# Altium PCB LPCB281R0.PcbDoc
Units mm, origin at the board's own origin, x right, y up, seen from the top; angles counter-clockwise.
Board outline 96 x 79 mm, 2 copper layers (Top Layer, Bottom Layer); 47 components, 22 nets, 135 pads, 13 vias.
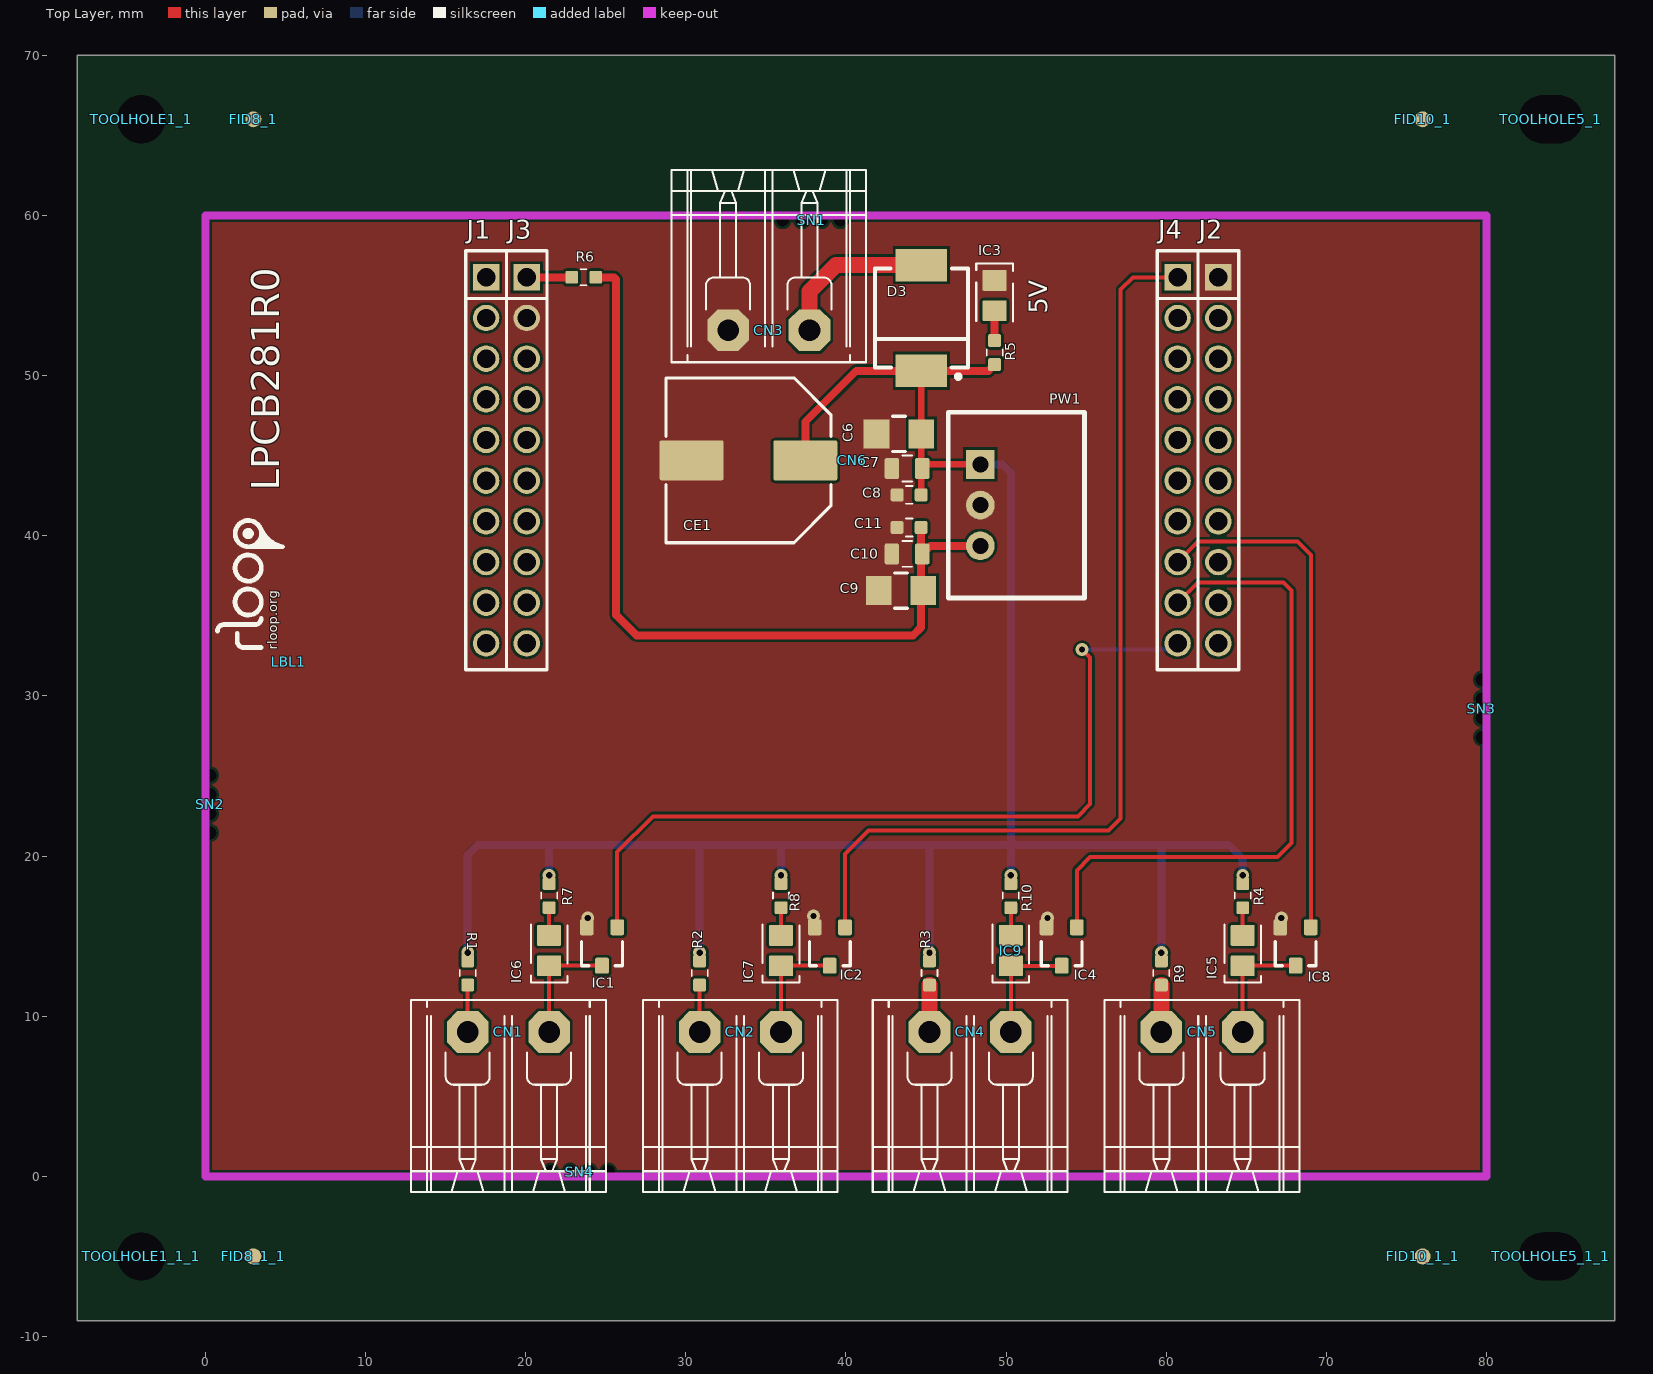
[diagram p0: Top Layer view]
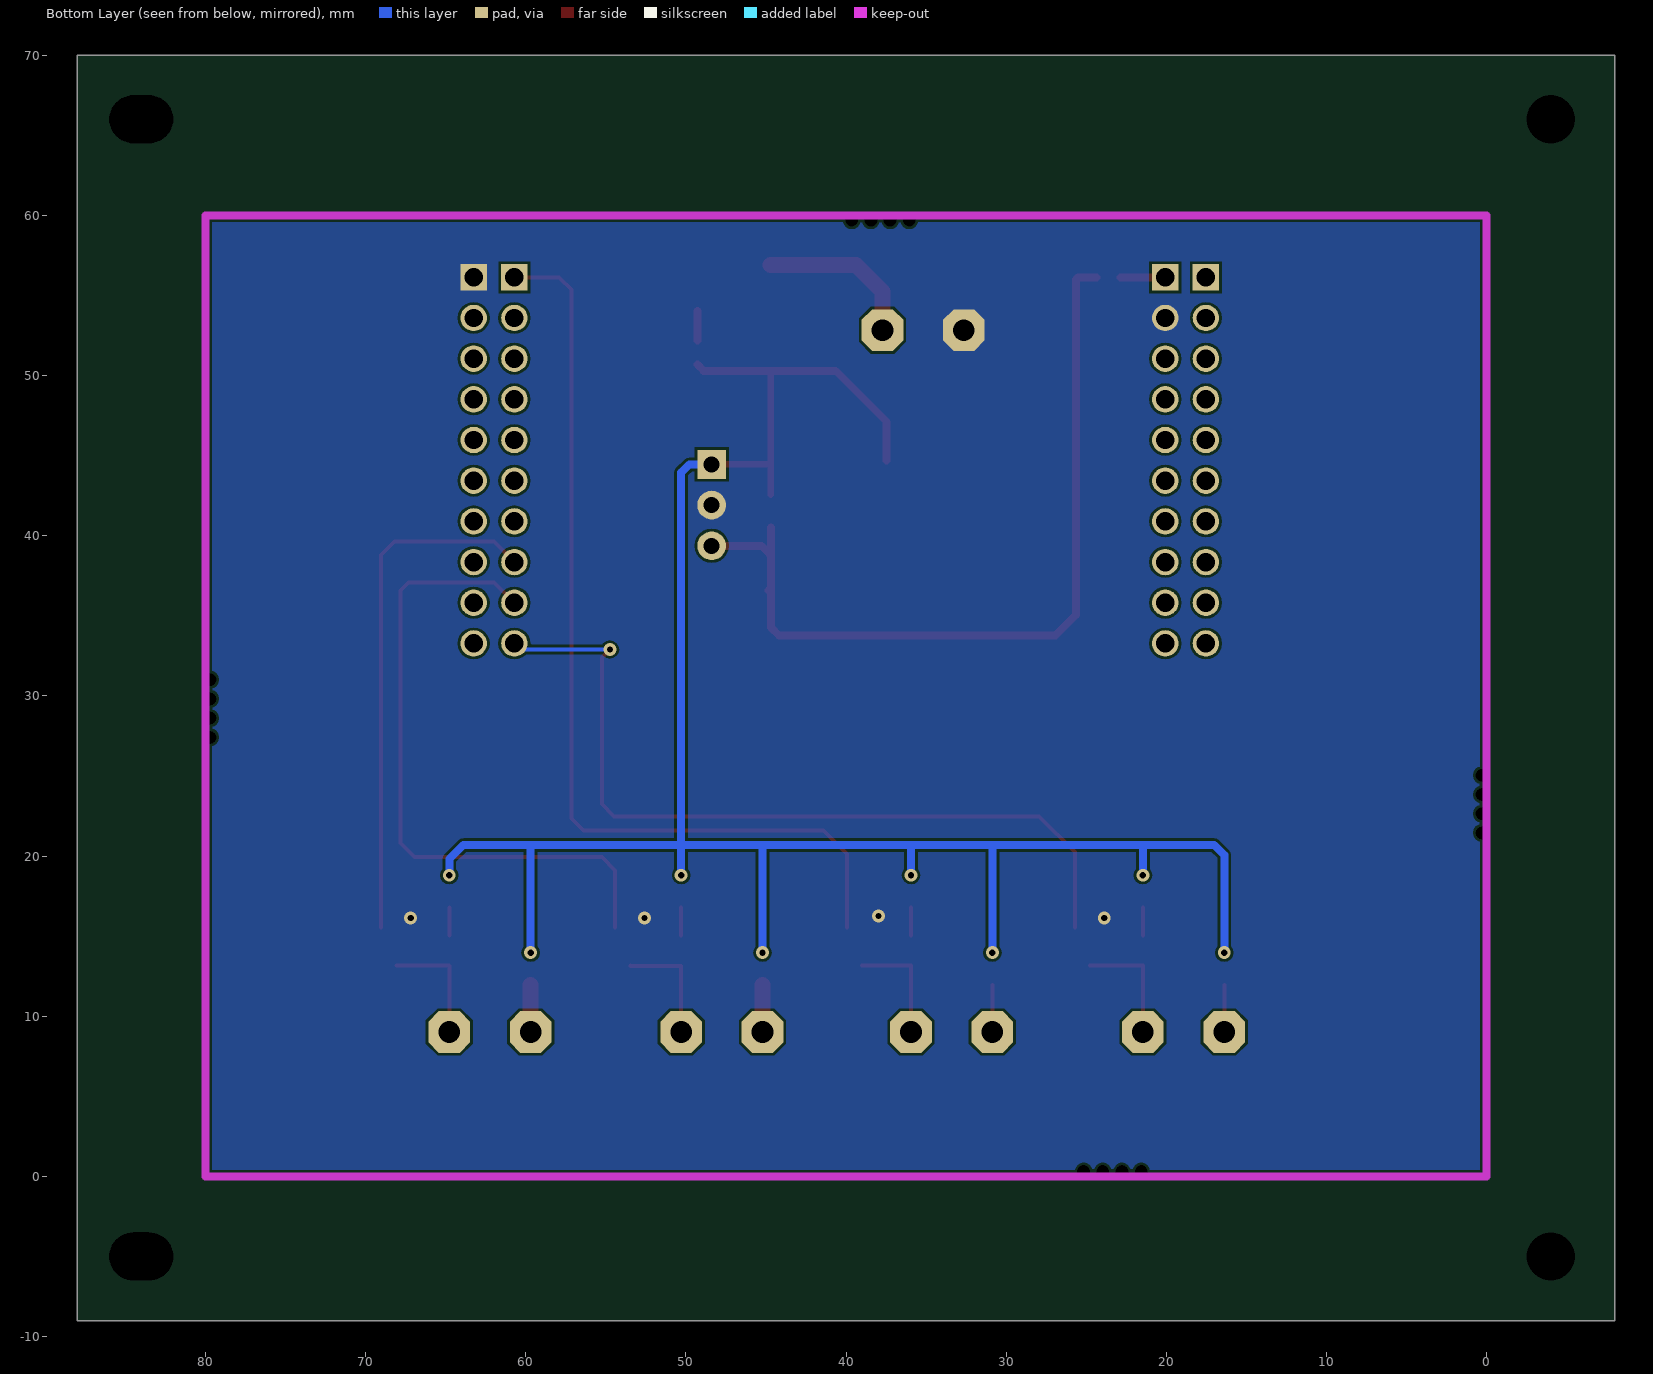
[diagram p1: Bottom Layer view, seen from below]

## Layer stack, top to bottom
Top Layer: signal copper 0.0356
Dielectric: dielectric 0.32, FR-4, Dk 4.8
Bottom Layer: signal copper 0.0356

## Board outline
-8,-9 -8,70 88,70 88,-9

## Design rules (kind name [scope] priority, off if disabled: settings)
Clearance [All] p1: gap=0.16
Height [All] p1 off: minheight=0 maxheight=25.4 prefheight=12.7
HoleSize [All] p1: absolutevalues=TRUE maxlimit=6 minlimit=0.025 maxpercent=80.000 minpercent=20.000
MinimumSolderMaskSliver [All] p1 off: minsoldermaskwidth=0.1
PlaneConnect PlaneConnect_1 [IsVia] p1: planeconnectstyle=Direct reliefexpansion=0.508 reliefentries=4 reliefconductorwidth=0.254 reliefairgap=0.254
PlaneConnect [All] p2: planeconnectstyle=Relief reliefexpansion=0.508 reliefentries=4 reliefconductorwidth=0.254 reliefairgap=0.254
PolygonConnect [IsVia] p1: connectstyle=Direct reliefconductorwidth=0.254 reliefentries=4 polygonreliefangle="90 Angle" airgapwidth=0.254
PolygonConnect PolygonConnect_1 [All] p2: connectstyle=Direct reliefconductorwidth=0.254 reliefentries=4 polygonreliefangle="90 Angle" airgapwidth=0.254
RoomDefinition "U_LPCB281 - LIGHT TOWER" [InComponentClass('U_LPCB281 - LIGHT TOWER')] p1: confinementstyle=ConfineIn formatcopy=TRUE lockcomponents=FALSE outline -154.685,-121.268 -103.885,-121.268 -103.885,-95.868 -154.685,-95.868
RoomDefinition "U_LPCB281 - RM57 LAUNCH" [InComponentClass('U_LPCB281 - RM57 LAUNCH')] p2: confinementstyle=ConfineIn formatcopy=TRUE lockcomponents=FALSE outline 169.038,50.563 204.979,50.563 204.979,100.855 169.038,100.855
RoomDefinition "U_LPCB281 - POWER" [InComponentClass('U_LPCB281 - POWER')] p3: confinementstyle=ConfineIn formatcopy=TRUE lockcomponents=FALSE outline 169.165,31.386 336.932,31.386 336.932,50.69 169.165,50.69
RoutingVias [All] p1: holewidth=0.6 width=1.2 viastyle="Through Hole" minholewidth=0.3 minwidth=0.6 maxholewidth=1 maxwidth=2
SilkToSilkClearance [All] p1 off: silktosilkclearance=0.1
SilkToSolderMaskClearance [IsPad] p1 off: minsilkscreentomaskgap=0.1 clearancetoexposedcopper=TRUE
SolderMaskExpansion [All] p1: expansion=0.102
Width [All] p1: maxlimit=1 minlimit=0.16 preferedwidth=0.2
22 further rules are at their usual default settings.

## Classes and differential pairs
component class "U_LPCB281 - DIR RELAYS": CN1 CN2 CN4 IC1 IC2 IC4 IC6 IC7 IC9 R1 R2 R3 R7 R8 R10
component class "U_LPCB281 - POWER": C6 C7 C8 C9 C10 C11 CE1 CN3 D3 IC3 PW1 R5
component class "U_LPCB281 - LIGHT TOWER": CN5 IC5 IC8 R4 R9
component class "U_LPCB281 - RM57 LAUNCH": CN6 R6
component class "LPCB281 - TOP": LBL1 SN1 SN2 SN3 SN4

## Components (designator, comment, footprint, x,y, rotation, side; value= is the part's Value field where it differs from the comment)
C6 "10uF / 50V / 10% / SMD 1206" LFP043__CC3216-1206 43.307,46.355 r180 top
C7 "1uF / 50V / 10% / SMD 0805" LFP010__CC2012-0805-IPC7351_B 43.815,44.196 r180 top
C8 "100nF / 50V / 10% / SMD 0603" LFP011__CC1608-0603-IPC7351_B 43.942,42.545 r180 top
C9 "10uF / 50V / 10% / SMD 1206" LFP043__CC3216-1206 43.434,36.576 r180 top
C10 "1uF / 50V / 10% / SMD 0805" LFP010__CC2012-0805-IPC7351_B 43.815,38.862 r180 top
C11 "100nF / 50V / 10% / SMD 0603" LFP011__CC1608-0603-IPC7351_B 43.942,40.513 r180 top
CE1 "330uF / 35V / 20% / SMD 10x10" LFP041__NICHICON_WT_10X10 33.909,44.704 r180 top
CN1 "691 313 510 002" "691 313 510 002" 16.383,9.017 r0 top
CN2 "691 313 510 002" "691 313 510 002" 30.861,9.017 r0 top
CN3 "691 313 510 002" "691 313 510 002" 37.719,52.832 r180 top
CN4 "691 313 510 002" "691 313 510 002" 45.212,9.017 r0 top
CN5 "691 313 510 002" "691 313 510 002" 59.69,9.017 r0 top
CN6 "RM57LAUNCHXL_BP_40P_1" RM57LAUNCHXL_BP_40P_1 17.526,56.134 r0 top
D3 "S3M-E3/57T" LFP040__DO-214AB 44.704,53.594 r90 top
FID8_1 "FIDUCIAL" LFP113__FIDUCIAL 3,66 r0 top
FID8_1_1 "FIDUCIAL" LFP113__FIDUCIAL 3,-5 r0 top
FID10_1 "FIDUCIAL" LFP113__FIDUCIAL 76,66 r0 top
FID10_1_1 "FIDUCIAL" LFP113__FIDUCIAL 76,-5 r0 top
IC1 "NUD3124LT1G" LFP021__SOT23 24.765,14.351 r180 top
IC2 "NUD3124LT1G" LFP021__SOT23 38.989,14.351 r180 top
IC3 "EL-17-21VGC/TR8" CR2012-0805-LED 49.276,54.991 r270 top
IC4 "NUD3124LT1G" LFP021__SOT23 53.467,14.351 r180 top
IC5 "EL-17-21VGC/TR8" CR2012-0805-LED 64.77,14.097 r90 top
IC6 "EL-17-21VGC/TR8" CR2012-0805-LED 21.463,14.097 r90 top
IC7 "EL-17-21VGC/TR8" CR2012-0805-LED 35.941,14.097 r90 top
IC8 "NUD3124LT1G" LFP021__SOT23 68.072,14.351 r180 top
IC9 "EL-17-21VGC/TR8" CR2012-0805-LED 50.292,14.097 r90 top
LBL1 "RLOOP_LOGO" RLOOP_LOGO 5.207,32.131 r90 top
PW1 "173010542" 173010542 48.387,41.91 r270 top
R1 "0R / 0.1W / SMD 0603" LFP020__CR1608-0603-IPC7351_B 16.383,12.7 r90 top
R2 "0R / 0.1W / SMD 0603" LFP020__CR1608-0603-IPC7351_B 30.861,12.7 r90 top
R3 "0R / 0.1W / SMD 0603" LFP020__CR1608-0603-IPC7351_B 45.212,12.7 r90 top
R4 "2.2K / 0.1W / 1% / SMD 0603" LFP020__CR1608-0603-IPC7351_B 64.77,17.526 r270 top
R5 "2.2K / 0.1W / 1% / SMD 0603" LFP020__CR1608-0603-IPC7351_B 49.276,51.435 r270 top
R6 "0R / 0.1W / SMD 0603" LFP020__CR1608-0603-IPC7351_B 23.622,56.134 r0 top
R7 "2.2K / 0.1W / 1% / SMD 0603" LFP020__CR1608-0603-IPC7351_B 21.463,17.526 r270 top
R8 "2.2K / 0.1W / 1% / SMD 0603" LFP020__CR1608-0603-IPC7351_B 35.941,17.526 r270 top
R9 "0R / 0.1W / SMD 0603" LFP020__CR1608-0603-IPC7351_B 59.69,12.7 r90 top
R10 "2.2K / 0.1W / 1% / SMD 0603" LFP020__CR1608-0603-IPC7351_B 50.292,17.526 r270 top
SN1 "PCB_SNAPOUT_0.3MM" PCB_SNAPOUT_0.3MM 37.846,60 r180 top
SN2 "PCB_SNAPOUT_0.3MM" PCB_SNAPOUT_0.3MM 0,23.241 r270 top
SN3 "PCB_SNAPOUT_0.3MM" PCB_SNAPOUT_0.3MM 80,29.21 r90 top
SN4 "PCB_SNAPOUT_0.3MM" PCB_SNAPOUT_0.3MM 23.368,0 r0 top
TOOLHOLE1_1 "Comment" TOOL-1#1 -4,66 r0 top
TOOLHOLE1_1_1 "Comment" TOOL-1#1 -4,-5 r0 top
TOOLHOLE5_1 "Comment" TOOL-1#2 84,66 r0 top
TOOLHOLE5_1_1 "Comment" TOOL-1#2 84,-5 r0 top

## Footprints (in the part's own frame and the unit in brackets; to place one, negate y for a bottom-side part, rotate by r counter-clockwise, add the part's x,y. Pads: shape width x height; smd on the part's side, far side on the other; paste and mask are expansions set on the pad)
"691 313 510 002" [mm] "Connector, Pluggable Terminal Block, 5.08mm, 2 Way, PTH"
  oct 2.6x2.6 hole 1.35: 1(0,0) 2(5.08,0)
  silkscreen extent -3.54,-10 8.62,2
173010542 [mm]
  rect 1.8x1.8 hole 1 paste-0.01: 1(-2.54,0)
  round 1.8 hole 1 paste-0.01: 2(0,0) 3(2.54,0)
  silkscreen extent -5.8,-2 5.8,6.5
CR2012-0805-LED [mm]
  rrect10% 1.3x1.5 smd paste-0.05: A(0.95,0) K(-0.95,0)
  silkscreen extent -2.01,-1.14 1.63,1.14
LFP010__CC2012-0805-IPC7351_B [mm]
  rrect25% 0.9x1.3 smd paste-0.01: 1(-0.95,0) 2(0.95,0)
  silkscreen extent -0.3,-0.8 0.3,0.8
LFP011__CC1608-0603-IPC7351_B [mm]
  rrect25% 0.8x0.8 smd: 1(-0.75,0) 2(0.75,0)
  silkscreen extent -0.2,-0.55 0.2,0.55
LFP020__CR1608-0603-IPC7351_B [mm]
  rrect25% 0.8x0.8 smd: 1(-0.75,0) 2(0.75,0)
  silkscreen extent -0.2,-0.5 0.2,0.5
LFP021__SOT23 [mm] "SOT-23; 3 Leads; Body 3.0 x 2.5 mm, inc. leads (LxW max)"
  rrect25% 0.85x1 smd paste-0.05: 1(-0.95,-1.2) 2(0.95,-1.2) 3(0,1.2)
  silkscreen extent -1.27,-0.3 1.28,1.2
LFP040__DO-214AB [mm]
  rect 2.032x3.2 smd: 1(-3.3,0) 2(3.3,0)
  silkscreen extent -3.8,-2.9 3.1,2.9
LFP041__NICHICON_WT_10X10 [mm]
  rrect10% 4x2.5 smd paste-0.02: 1(-3.55,0) 2(3.55,0)
  silkscreen extent -5.15,-5.15 5.15,5.15
LFP043__CC3216-1206 [mm]
  rect 1.6x1.8 smd paste-0.01: 1(-1.4,0) 2(1.4,0)
  silkscreen extent -0.4,-1.1 0.4,1.1
LFP113__FIDUCIAL [mm]
  round 1 smd paste-2 mask+1.5: 0(0,0)
PCB_SNAPOUT_0.3MM [mm]
  round 0.4 hole 0.8 unplated: 0(-1.8,0.3) 0(-0.6,0.3) 0(0.6,0.3) 0(1.8,0.3)
RLOOP_LOGO [mm]
  silkscreen extent 0.89,0.39 8.82,4.45
RM57LAUNCHXL_BP_40P_1 [mm]
  rect 1.65x1.65 hole 1.15: J1_1(0,0) J2_1(45.72,0) J3_1(2.54,0) J4_1(43.18,0)
  round 1.65 hole 1.15: J1_2(0,-2.54) J1_3(0,-5.08) J1_4(0,-7.62) J1_5(0,-10.16) J1_6(0,-12.7) J1_7(0,-15.24) J1_8(0,-17.78) J1_9(0,-20.32) J1_10(0,-22.86) J2_2(45.72,-2.54) J2_3(45.72,-5.08) J2_4(45.72,-7.62) J2_5(45.72,-10.16) J2_6(45.72,-12.7) J2_7(45.72,-15.24) J2_8(45.72,-17.78) J2_9(45.72,-20.32) J2_10(45.72,-22.86) J3_2(2.54,-2.54) J3_3(2.54,-5.08) J3_4(2.54,-7.62) J3_5(2.54,-10.16) J3_6(2.54,-12.7) J3_7(2.54,-15.24) J3_8(2.54,-17.78) J3_9(2.54,-20.32) J3_10(2.54,-22.86) J4_2(43.18,-2.54) J4_3(43.18,-5.08) J4_4(43.18,-7.62) J4_5(43.18,-10.16) J4_6(43.18,-12.7) J4_7(43.18,-15.24) J4_8(43.18,-17.78) J4_9(43.18,-20.32) J4_10(43.18,-22.86)
  silkscreen extent -1.27,-24.51 46.99,1.65, body extent -1.27,-24.43 46.99,1.57, height 8.59
TOOL-1#1 [mm]
  round 2.54 hole 3 unplated: TOOL(0,0)
TOOL-1#2 [mm]
  round 0.076 hole 3 slot 4 at 0 deg unplated: TOOL1(0,0)

## Part data
C6 C9: "Capacitor, Ceramic Chip, 10uF, 50V, X5R, 10%, SMD 1206 [LCA144]"
C7 C10: "Capacitor, Ceramic Chip, 1uF, 50V, SMD 0805 [LCA098]"
C8 C11: "Capacitor, Ceramic Chip, 100nF (0.1uF), 50V, 5%, SMD 0603 [LCA016]"
CE1: "Capacitor, Aluminum Electrolytic, 330uF, 35V, 20%, SMD (10mm x 10mm) [LCA071]"
CN1 CN2 CN3 CN4 CN5: "Connector, Pluggable Terminal Block, 5.08mm, 2 Way, PTH"
CN6: "Connector, RM57L843 LaunchXL, 40Pin Boosterpack Site1"
D3: "Diode, General Purpose Rectifier, 3A, 200V, SMD DO-214AB [LIC189]"
IC1 IC2 IC4 IC8: "IC, Relay Driver, 28V Industrial, SMD SOT23 [LIC292]"
IC3 IC5 IC6 IC7 IC9: "LED, SMD, 0805 Green [LIC016]"
R1 R2 R3 R6 R9: "Resistor, Ceramic Chip, 0R, 0.1W, SMD 0603 [LRE026]"
R4 R5 R7 R8 R10: "Resistor, Ceramic Chip, 2.2K, 0.1W, 1%, SMD 0603 [LRE027]"
SN1 SN2 SN3 SN4: "PCB Snapout + 0.3mm"

## Via types
v1: diameter 0.8, hole 0.4, Top Layer to Bottom Layer, tented both sides, 13 vias

## Nets (pads, with @x,y where several pads share a name; then routed paths per layer and width w, separated by ;. In a path a pad name is that pad's centre, name@x,y a point inside that pad or via, vN(x,y) a via of type N, cw(c..) or ccw(c..) an arc to the next point about the centre after c; other vN are vias at no path point)
AUX_DIR: CN6.J4_10 IC1.1 | length 51.5
  Top Layer w0.25: IC1.1 25.715,20.254 27.94,22.479 54.483,22.479 55.245,23.241 55.245,32.385 v1(54.737,32.893)
  Bottom Layer w0.25: v1(54.737,32.893) 60.325,32.893 CN6.J4_10
AUX_ENABLE: CN6.J4_9 IC4.1 | length 41.3
  Top Layer w0.25: IC4.1 54.417,19.111 55.245,19.939 66.929,19.939 67.818,20.828 67.818,36.576 67.31,37.084 61.976,37.084 CN6.J4_9
AUX_VELOC: CN6.J4_1 IC2.1 | length 59.6
  Top Layer w0.25: IC2.1 39.939,20.127 41.402,21.59 56.388,21.59 57.15,22.352 57.15,55.372 57.912,56.134 CN6.J4_1
DGND: C6.2 C7.2 C8.2 C9.2 C10.2 C11.2 CE1.2 CN3.2 CN6.J2_1 CN6.J3_2 IC1.2 IC2.2 IC3.K IC4.2 IC8.2 PW1.2
  other v1: 23.876,16.129 52.578,16.129 67.183,16.129 37.973,16.256
NetCN1_1: CN1.1 R1.1 | length 2.9
  Top Layer w0.25: CN1.1 R1.1
NetCN1_2: CN1.2 IC1.3 IC6.K | length 7.4
  Top Layer w0.25: CN1.2 IC6.K 21.467,13.151 IC1.3
NetCN2_1: CN2.1 R2.1 | length 2.9
  Top Layer w0.25: CN2.1 R2.1
NetCN2_2: CN2.2 IC2.3 IC7.K | length 7.2
  Top Layer w0.25: CN2.2 IC7.K 35.945,13.151 IC2.3
NetCN3_1: CN3.1 D3.2 | length 10.1
  Top Layer w1: CN3.1 37.719,55.245 39.368,56.894 D3.2
NetCN4_1: CN4.1 R3.1 | length 2.9
  Top Layer w1: CN4.1 R3.1
NetCN4_2: CN4.2 IC4.3 IC9.K | length 7.3
  Top Layer w0.25: CN4.2 IC9.K 53.463,13.147 IC4.3
NetCN5_1: CN5.1 R9.1 | length 2.9
  Top Layer w1: CN5.1 R9.1
NetCN5_2: CN5.2 IC5.K IC8.3 | length 7.4
  Top Layer w0.25: CN5.2 IC5.K 64.774,13.151 IC8.3
NetCN6_J3_1: CN6.J3_1 R6.1 | length 2.8
  Top Layer w0.5: CN6.J3_1 R6.1
NetCN6_J4_8: CN6.J4_8 IC8.1 | length 32.4
  Top Layer w0.25: CN6.J4_8 61.976,39.624 68.199,39.624 69.022,38.801 IC8.1
NetIC3_A: IC3.A R5.1 | length 1.9
  Top Layer w0.5: R5.1 IC3.A
NetIC5_A: IC5.A R4.2 | length 1.7
  Top Layer w0.25: IC5.A R4.2
NetIC6_A: IC6.A R7.2 | length 1.7
  Top Layer w0.25: IC6.A R7.2
NetIC7_A: IC7.A R8.2 | length 1.7
  Top Layer w0.25: IC7.A R8.2
NetIC9_A: IC9.A R10.2 | length 1.7
  Top Layer w0.25: IC9.A R10.2
P5V: C9.1 C10.1 C11.1 PW1.3 R6.2 | length 52.3
  Top Layer w0.5: R6.2 25.527,56.134 25.654,56.007 25.654,35.052 26.924,33.782 44.196,33.782 44.692,34.278 C9.1@44.692,36.718 ; C11.1 C9.1@44.692,36.718 ; C10.1 45.273,39.37 PW1.3 ; C9.1 C9.1@44.692,36.718
P24V: C6.1 C7.1 C8.1 CE1.1 D3.1 PW1.1 R1.2 R2.2 R3.2 R4.1 R5.2 R7.1 R8.1 R9.2 R10.1 | length 134.7
  Top Layer w0.4: C8.1 44.704,42.557 C7.1@44.704,44.323 ; D3.1 C7.1@44.704,44.323 ; PW1.1 44.831,44.45 C7.1@44.704,44.323
  Top Layer w0.5: CE1.1 37.459,47.111 40.642,50.294 D3.1 48.885,50.294 R5.2
  Bottom Layer w0.5: v1(16.383,13.97) 16.383,20.066 17.018,20.701 21.463,20.701 ; v1(21.463,18.796) 21.463,20.701 ; v1(30.861,13.97) 30.861,20.701 ; v1(35.941,18.796) 35.941,20.701 ; v1(45.212,13.97) 45.212,20.574 45.339,20.701 ; PW1.1 49.784,44.45 50.292,43.942 50.292,20.701 ; v1(50.292,18.796) 50.292,20.701 ; v1(59.69,13.97) 59.69,20.574 59.817,20.701 ; v1(64.77,18.796) 64.77,19.812 63.881,20.701 59.817,20.701 ; 21.463,20.701 30.861,20.701 ; 30.861,20.701 35.941,20.701 ; 35.941,20.701 45.339,20.701 ; 45.339,20.701 50.292,20.701 ; 50.292,20.701 59.817,20.701
pads on no net: CN6.J1_1 CN6.J1_2 CN6.J1_3 CN6.J1_4 CN6.J1_5 CN6.J1_6 CN6.J1_7 CN6.J1_8 CN6.J1_9 CN6.J1_10 CN6.J2_2 CN6.J2_3 CN6.J2_4 CN6.J2_5 CN6.J2_6 CN6.J2_7 CN6.J2_8 CN6.J2_9 CN6.J2_10 CN6.J3_3 CN6.J3_4 CN6.J3_5 CN6.J3_6 CN6.J3_7 CN6.J3_8 CN6.J3_9 CN6.J3_10 CN6.J4_2 CN6.J4_3 CN6.J4_4 CN6.J4_5 CN6.J4_6 CN6.J4_7 FID8_1.0 FID8_1_1.0 FID10_1.0 FID10_1_1.0 SN1.0 SN2.0 SN3.0 SN4.0 TOOLHOLE1_1.TOOL TOOLHOLE1_1_1.TOOL TOOLHOLE5_1.TOOL1 TOOLHOLE5_1_1.TOOL1

## Polygon pours and split planes (outlines as drawn)
DGND on Top Layer "Bottom Layer-No Net" (solid, remove dead copper, pour order 2): 0,0 0,60 80,60 80,0
DGND on Bottom Layer "Bottom Layer-No Net" (solid, remove dead copper, pour order 2): 0,0 0,60 80,60 80,0

## Keep-outs
Keep-Out Layer:
  lines w0.5: 0,0 0,60 80,60 80,0 0,0

## Silkscreen, mask and mechanical layers (free items; w line width, h text height)
Top Overlay:
  text "5V" at 52.959,53.848 h2 r90
  text "LPCB281R0" at 5.207,42.799 h3 r90
Top Paste:
  lines w1: -22.647,-45.577 -22.647,167.423 177.353,167.423 177.353,-45.577 -22.647,-45.577
Mechanical 1:
  lines w0.1: -8,-9 88,-9 88,70 -8,70 -8,-9
  lines w0.127: 0,0 80,0 80,60 0,60 0,0
Mechanical 3:
  lines w2.4: -1.2,20.009 -1.2,-1.2 20.644,-1.2 ; -1.2,26.105 -1.2,61.2 34.741,61.2 ; 26.105,-1.2 81.2,-1.2 81.2,25.597 ; 40.837,61.2 81.2,61.2 81.2,31.693
Mechanical 4:
  lines w0.203: 74.158,-74.783 112.099,-74.783 ; 112.059,-85.215 74.167,-85.223 74.167,-53.219 112.059,-53.215 ; 112.099,-85.222 112.099,-53.222
  lines w0.305: 112.751,-82.533 188.696,-82.536 ; 112.751,-78.533 188.696,-78.523 ; 112.751,-74.777 188.696,-74.793 ; 112.756,-74.77 188.701,-74.786 ; 112.756,-71.045 188.701,-71.048 ; 112.756,-67.045 188.701,-67.035 ; 112.756,-63.045 188.701,-63.047 ; 113.059,-59.215 188.559,-59.215 264.559,-59.215 ; 113.059,-58.715 188.559,-58.715 ; 125.349,-85.972 125.349,-53.222 ; 138.099,-85.972 138.099,-53.222 ; 150.849,-85.972 150.849,-53.222 ; 162.849,-85.972 162.849,-53.222 ; 177.215,-86.01 177.215,-53.244 ; 188.701,-78.544 264.698,-78.544 ; 188.726,-71.051 264.749,-71.051 ; 199.904,-86.037 199.904,-78.544 ; 218.724,-86.037 218.724,-78.544 ; 242.617,-86.09 242.617,-78.507 ; 242.701,-78.544 242.701,-71.051
  lines w0.508: -120.29,-46.032 -115.286,-46.032 ; -120.29,-1.049 -115.286,-1.049 ; -120.29,43.935 -115.286,43.935 ; -120.29,88.943 -115.286,88.943 ; -120.29,133.927 -115.286,133.927 ; -55.291,-91.041 -55.291,-86.037 ; -55.291,173.957 -55.291,178.961 ; -2.993,173.957 -2.993,178.961 ; 9.707,-91.041 9.707,-86.037 ; 55.343,173.969 55.343,178.973 ; 74.706,-91.041 74.706,-86.037 ; 112.809,-85.965 112.809,-53.215 264.559,-53.215 ; 139.704,-91.041 139.704,-86.037 ; 139.704,173.957 139.704,178.961 ; 188.697,-53.259 188.701,-86.037 ; 204.703,-91.041 204.703,-86.037 ; 204.703,173.957 204.703,178.961 ; 264.698,-46.032 269.702,-46.032 ; 264.698,-1.049 269.702,-1.049 ; 264.723,43.935 269.702,43.935 ; 264.723,88.943 269.702,88.943 ; 264.723,133.927 269.702,133.927 ; -120.29,-91.041 -120.29,178.961 269.702,178.961 269.702,-91.041 -120.29,-91.041 ; -115.286,-86.037 -115.286,173.957 264.723,173.957 264.723,-86.037 -115.286,-86.037
  text "1" at -85.289,174.948 h3
  text "2" at -37.994,174.948 h3
  text "3" at 39.705,174.948 h3
  text "4" at 103.713,174.948 h3
  text "5" at 172.724,174.948 h3
  text "6" at 233.71,174.948 h3
  text "A" at -118.283,152.951 h3
  text "A" at 265.714,152.951 h3
  text "B" at 265.714,109.924 h3
  text "B" at -118.283,108.933 h3
  text "C" at -118.283,63.95 h3
  text "C" at 265.714,63.95 h3
  text "D" at -118.283,18.966 h3
  text "D" at 265.714,18.966 h3
  text ".PCB_FILE_NAME_NO_PATH" at 272.543,2.303 h1.52 r90
  text "FILENAME:" at 272.416,-8.365 h1.52 r90
  text "E" at -118.283,-26.042 h3
  text "E" at 265.714,-26.042 h3
  text "SIL3_PCBTEMPLATE_A3.PCB" at 272.67,-40.75 h1.52 r90
  text "TEMPLATE:" at 272.521,-52.72 h1.52 r90
  text "ISSUE" at 115.559,-56.715 h2.01
  text "DATE" at 128.059,-56.715 h2.01
  text "ECN" at 141.559,-56.715 h2.01
  text "DRAWN" at 152.559,-56.715 h2.01
  text "APP" at 179.559,-56.715 h2.01
  text "SIL3 Pty Ltd" at 75.693,-56.752 h2.54
  text "CHECKED" at 164.134,-56.8 h2.01
  text ".SIL3_PROJECT" at 205.106,-57.26 h1.78
  text "PROJECT:" at 190.305,-57.389 h2.01
  text "Factory 10" at 75.541,-60.308 h1.52
  text "R1.0" at 115.16,-62.124 h2.01
  text "PCB DESCRIPTION:" at 190.559,-62.215 h2.01
  text "01.08.12" at 126.259,-62.342 h2.01
  text "LJG" at 153.768,-62.378 h2.01
  text "9-13 Dingley Avenue" at 75.541,-63.229 h1.52
  text "Dandenong, VICTORIA, 3175" at 75.541,-65.769 h1.52
  text ".SIL3_PCB_DESC" at 190.501,-67.166 h2.5
  text "AUSTRALIA" at 75.541,-68.436 h1.52
  text "F" at -118.283,-71.051 h3
  text "F" at 265.714,-71.051 h3
  text "http://www.sil3.com.au" at 75.541,-71.103 h1.52
  text "LAYER" at 243.46,-73.897 h2.01
  text "ASSY. NUMBER:" at 190.501,-74.532 h2.01
  text ".SIL3_LDLREV" at 214.123,-76.056 h3
  text ".DATE_PRINT" at 272.559,-77.215 h1.52 r90
  text "GENERAL TOLERANCE:" at 81.66,-77.831 h1.52
  text "+" at 87.248,-80.498 h1.27
  text "CLASIFFICATION:" at 242.965,-80.883 h2.01
  text "0.2 mm" at 89.788,-81.006 h1.65
  text "SCALE:" at 189.516,-81.033 h2.01
  text "SHEET" at 206.71,-81.033 h2.01
  text "-" at 87.248,-81.641 h1.27
  text "UNLESS OTHERWISE SPECIFIED" at 77.85,-84.054 h1.52
  text "1 OF 1" at 205.36,-84.438 h2.01
  text "NTS" at 190.627,-84.591 h2.01
  text "UNCLASSIFIED" at 244.235,-84.693 h2.03
  text "A3" at 265.559,-89.715 h1.78
  text "1" at -85.289,-90.05 h3
  text "2" at -25.294,-90.05 h3
  text "3" at 39.705,-90.05 h3
  text "4" at 103.713,-90.05 h3
  text "5" at 172.724,-90.05 h3
  text "6" at 233.71,-90.05 h3
  text "PRINT DATE:" at 272.521,-90.66 h1.52 r90

## Text inside footprints (layer, text, board x,y; h text height)
CN6: Top Overlay "J1" at 16.326,58.134 h2; Top Overlay "J2" at 62.026,58.134 h2; Top Overlay "J3" at 18.866,58.134 h2; Top Overlay "J4" at 59.486,58.134 h2
LBL1: Top Overlay "rloop.org" at 4.707,32.881 h1 r90